# EAGLE board LED_PCB_Layout (EAGLE 9.7.0)
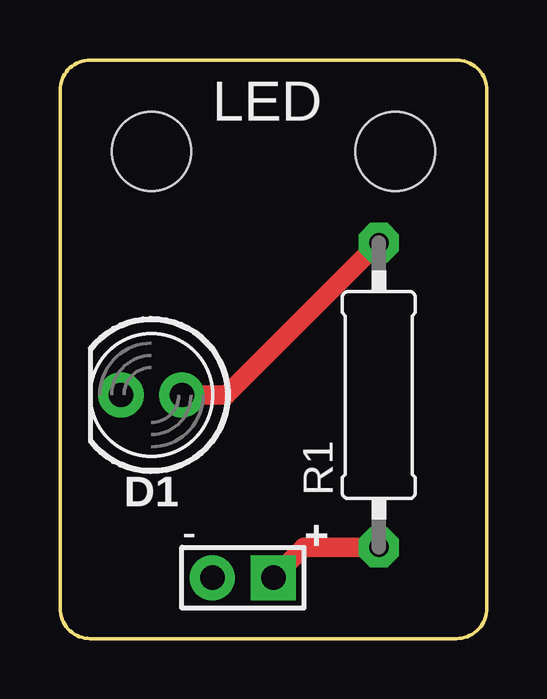
[diagram p0: board, top side]
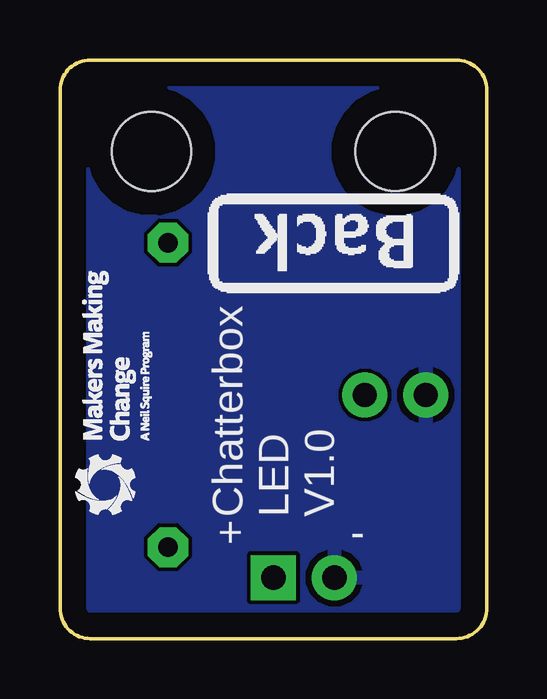
[diagram p1: board, bottom side, seen from below]

Size 17.78 x 24.13 mm. Coordinates in mm from the lower left corner, seen from the top.
Outline: 0,1.27 0,22.86 arc-90 1.27,24.13 16.51,24.13 arc-90 17.78,22.86 17.78,1.27 arc-90 16.51,0 1.27,0 arc-90 0,1.27
Copper layers (1*16): Top / Bottom
Stack-up Default Layer Stack: Top SilkScreen Epoxy Ink / Top SolderMask SR:Green 0.0254mm Dk 4.3 / Top Surface Finish Lead-Free 0.02mm / Top CuFoil:007 0.035mm / Dielectric-1 User Defined 1.5mm / Bottom CuFoil:007 0.035mm / Bottom Surface Finish Lead-Free 0.02mm / Bottom SolderMask SR:Green 0.0254mm Dk 4.3 / Bottom SilkScreen Epoxy Ink
Design rules: minimum copper width 6mil, minimum drill size 0.35mm, copper clearance wire_polygon to wire_polygon 6mil, copper clearance wire_polygon to pad_smd 6mil, copper clearance wire_polygon to via 6mil, copper clearance pad_smd to pad_smd 6mil, copper clearance pad_smd to via 6mil, copper clearance via to via 6mil, copper clearance smd to pad (same net) 6mil, copper clearance smd to via (same net) 6mil, copper clearance smd to smd (same net) 6mil, dimension clearance 40mil, via restrict clearance 0mil, restrict clearance 0mil, drill distance 6mil, keepout clearance 0mil

## Footprints (pad centres in the part's own frame; a part is rotated, then mirrored left to right if it is on the bottom)
HEADER_FEMALE-1X02 = drill 1.016 pad 1.88 square: 1 0,0 | drill 1.016 pad 1.88: 2 2.54,0
LED_5MM = drill 1.016 pad 1.88: A -1.27,0; K 1.27,0
0309/12 = drill 0.813 pad 1.676 octagon: 1 -6.35,0; 2 6.35,0
STAND-OFF = hole 3.302: 0,0

## Placement (x,y rotation side)
+  HEADER_FEMALE-1X2  [HEADER_FEMALE-1X02]  8.89,2.54 180 top
D1  [LED_5MM]  3.81,10.16 180 top
R1  2.2K  [0309/12]  13.28,10.16 90 top
U$1  MMC_LABEL-BACK  [LABEL-BACK]  6.35,16.51 180 bottom
U$2  STAND-OFF-  [STAND-OFF]  13.97,20.32 0 top
U$3  STAND-OFF-  [STAND-OFF]  3.81,20.32 0 top
U$4  MMC_LOGO-XSM  [MMC_X-SMALL_LOGO]  13.97,10.16 90 bottom

## Library data of the parts
+ D1 U$1-U$4 = MMC_Eagle
R1 = adafruit

## Nets
GND1: +.2 D1.K
N$1: +.1 R1.1
N$2: D1.A R1.2

## Tracks (layer width: path | path; a pad name or v marks a point on that pad's centre or on a via)
GND1
  pour Bottom: -1.27,25.4 19.05,25.4 19.05,-1.27 -1.27,-1.27
N$1
  Top 0.813: +.1 10.16,3.81 R1.1
N$2
  Top 0.813: R1.2 6.93,10.16 D1.A

## Text on the board
SilkscreenTop: LED | -
SilkscreenBottom: Chatterbox / LED / V1.0 | - | +